# Altium PCB Group9Hat.PcbDoc (part 2 of 2)
Units mm, origin at the board's own origin, x right, y up, seen from the top; angles counter-clockwise.
Board outline 64 x 85 mm, 4 copper layers (Top Side, Ground Plane, Power Plane, Bottom Side), stack 0.844 mm thick; 100 components, 66 nets, 332 pads, 118 vias.
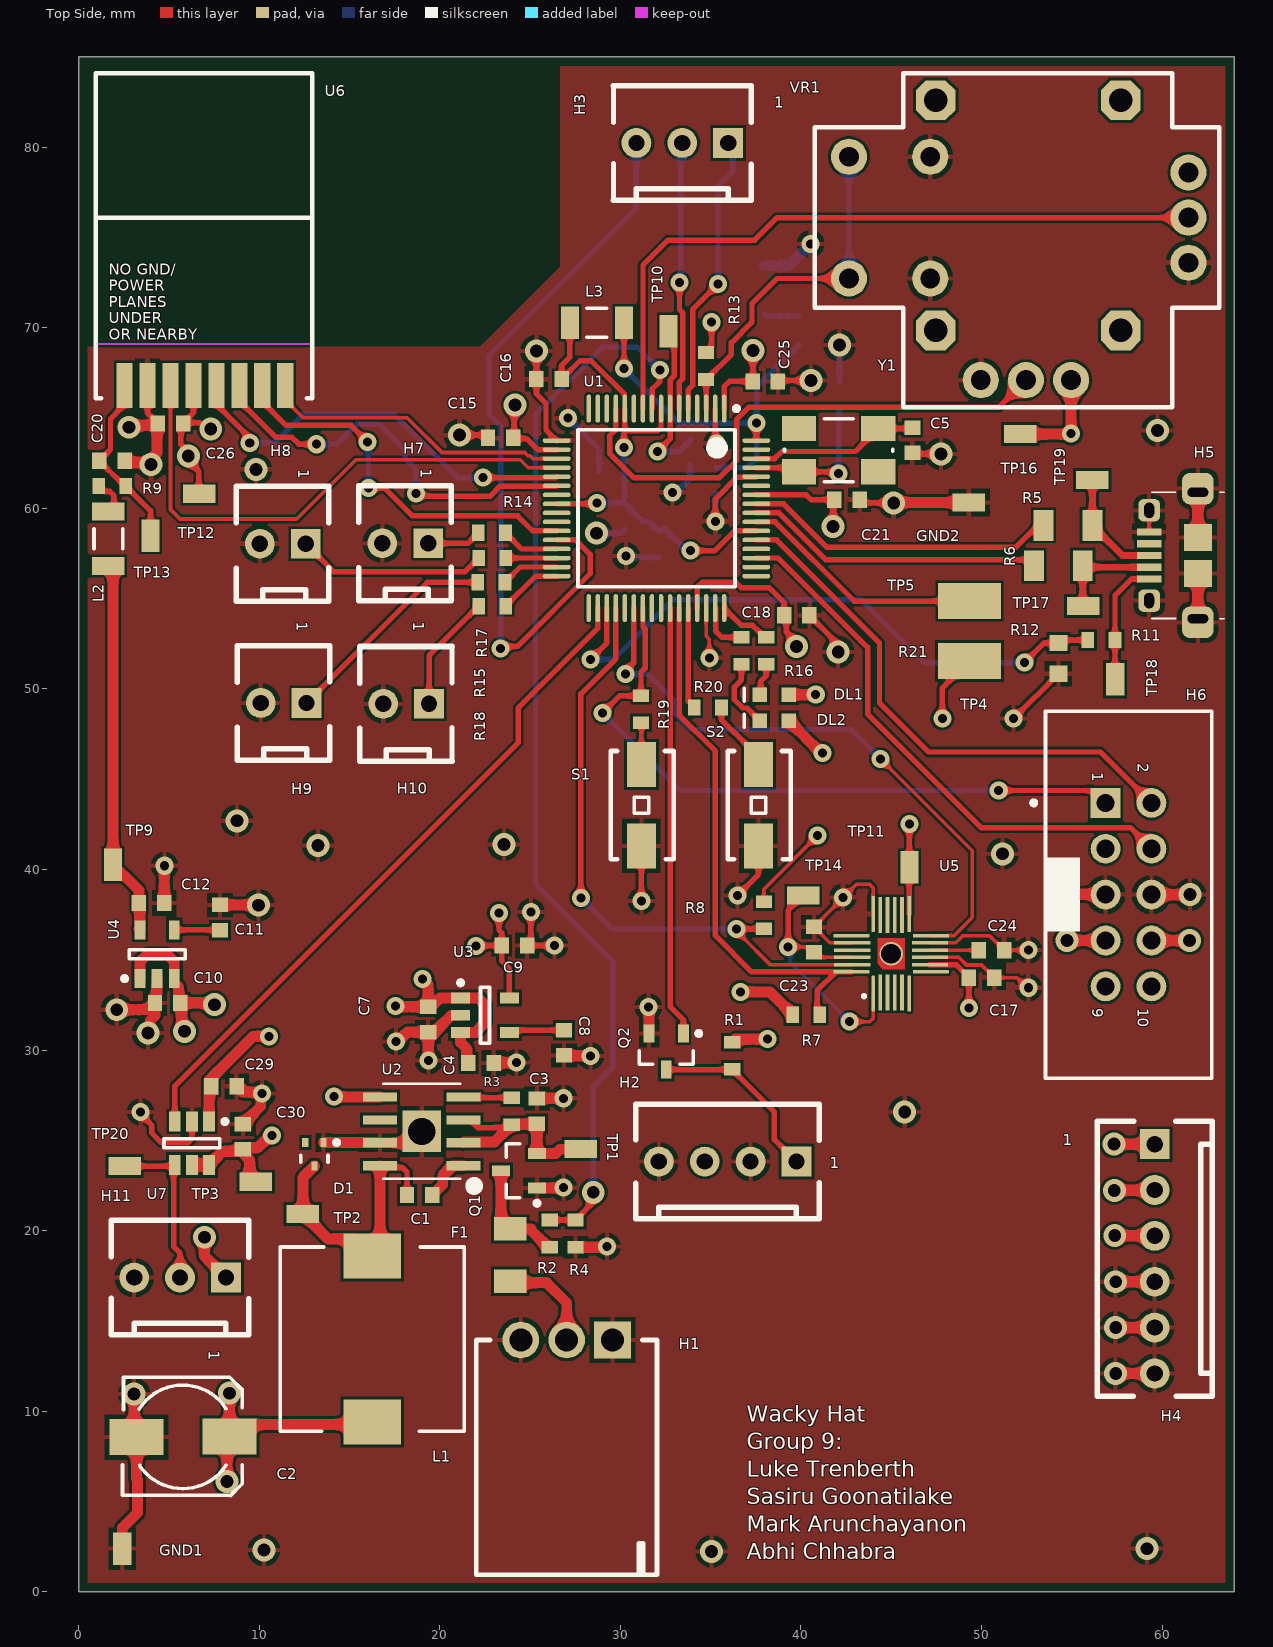
[diagram p0: Top Side view]

## Polygon pours and split planes (outlines as drawn) (continued)
no net on Power Plane (split plane): 26.223,28.814 26.265,28.786 26.314,28.776 42.39,28.776 52.639,18.527 52.681,18.499 52.73,18.489 63.396,18.489 63.396,18.443 51.368,18.443 42.008,27.803 41.966,27.831 41.916,27.841 26.927,27.841 21.783,32.985 19.853,34.915 19.811,34.943 19.761,34.953 18.567,34.953 18.518,34.943 18.476,34.915 12.621,29.06 9.807,29.06 9.312,29.556 8.765,30.102 8.765,33.198 8.756,33.247 8.728,33.289 7.102,34.915 7.06,34.943 7.01,34.953 0.51,34.953 0.51,35.558 6.906,35.558 9.116,33.347 9.116,30.455 9.126,30.405 9.154,30.363 10.043,29.474 10.085,29.446 10.135,29.436 12.421,29.436 12.47,29.446 12.512,29.474 15.509,32.471 18.596,35.558 19.479,35.558
GND on Ground Plane (split plane): 63.49,0.51 0.51,0.51 0.51,84.49 63.49,84.49

## Other copper
Top Side:
  pour cut-out: -0.025,85.039 26.645,85.039 26.67,85.014 26.67,73.381 22.657,69.367 22.225,68.936 -0.025,68.936 -0.025,69.342 -0.025,84.887 0.051,84.963
Bottom Side:
  pour cut-out: 13.691,80.442
  pour cut-out: 0.025,85.014 26.568,85.014 26.568,73.279 18.898,65.608 18.898,65.557 0.051,65.557 0.025,65.583
Power Plane (plane layer: these items are gaps in the copper):
  pour cut-out: 0.014,85.014 26.594,85.014 26.594,73.279 18.898,65.583 0,65.583 0,85
  lines w0.254: 0.025,35.687 6.96,35.687 9.246,33.401 9.246,30.455 10.135,29.566 12.421,29.566 15.418,32.563 18.542,35.687 19.533,35.687 26.314,28.905 42.443,28.905 52.73,18.618 63.881,18.618 63.881,28.905 ; 0.076,30.861 0.076,34.823 7.01,34.823 8.636,33.198 8.636,30.048 9.22,29.464 9.754,28.931 12.04,28.931 12.675,28.931 18.567,34.823 19.761,34.823 21.692,32.893 26.873,27.711 41.916,27.711 51.314,18.313 63.525,18.313 63.525,27.711

## Silkscreen, mask and mechanical layers (free items; w line width, h text height)
Top Overlay:
  text "Wacky Hat  / Group 9: / Luke Trenberth / Sasiru Goonatilake / Mark Arunchayanon / Abhi Chhabra" at 37.008,1.499 h1.52
Board Outline:
  the board outline again, w0.254

## Dimensions
64,86 to 0,86 on Mechanical 1
65,85 to 65,0 on Mechanical 1

## Text inside footprints (layer, text, board x,y; h text height)
H2: Top Overlay "1" at 41.605,23.444 h0.6
H3: Top Overlay "1" at 38.532,82.194 h0.6
H4: Top Overlay "1" at 54.508,24.74 h0.6
H5: Mechanical 1 "PCB Edge" at 63.884,55.089 h0.6 r90
H6: Top Overlay "9" at 56.121,32.328 h0.6 r270; Top Overlay "10" at 58.661,32.328 h0.6 r270; Top Overlay "1" at 56.121,45.388 h0.6 r270; Top Overlay "2" at 58.661,45.888 h0.6 r270
H7: Top Overlay "1" at 18.94,62.191 h0.6 r270
H8: Top Overlay "1" at 12.159,62.166 h0.6 r270
H9: Top Overlay "1" at 12.09,53.721 h0.6 r270
H10: Top Overlay "1" at 18.517,53.721 h0.6 r270
H11: Top Overlay "1" at 7.214,13.36 h0.6 r270
U2: Mechanical 13 "*" at 20.93,24.344 h0.6 r180
U6: Top Overlay "NO GND/ / POWER / PLANES / UNDER / OR NEARBY" at 1.676,69.342 h0.6